# Altium PCB PCB1.PcbDoc
Units mil, origin at the board's own origin, x right, y up, seen from the top; angles counter-clockwise.
Board outline 6000 x 4000 mil, 2 copper layers (Top Layer, Bottom Layer); 65 components, 72 nets, 252 pads, 4 vias.
Unrouted connection lines stored in the file: 163.
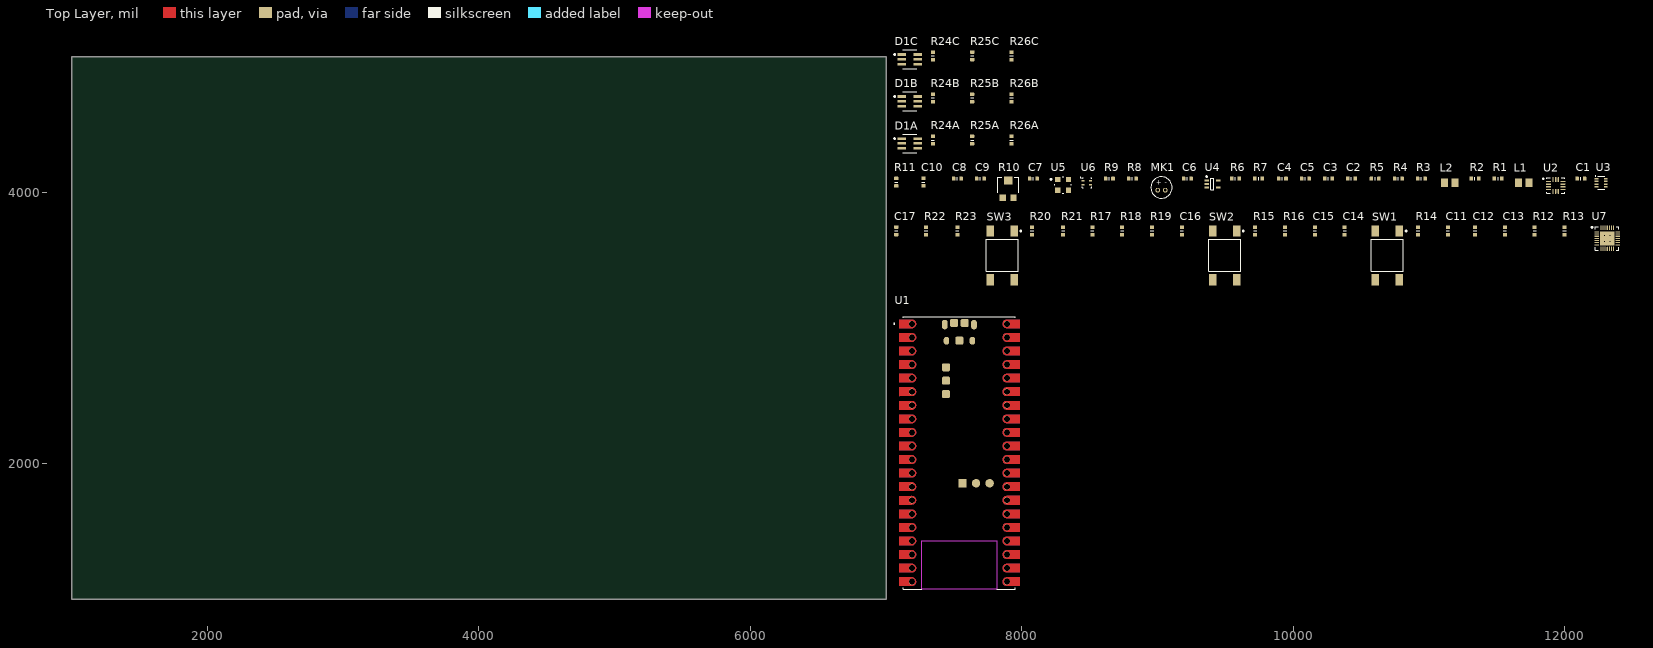
[diagram p0: Top Layer view]
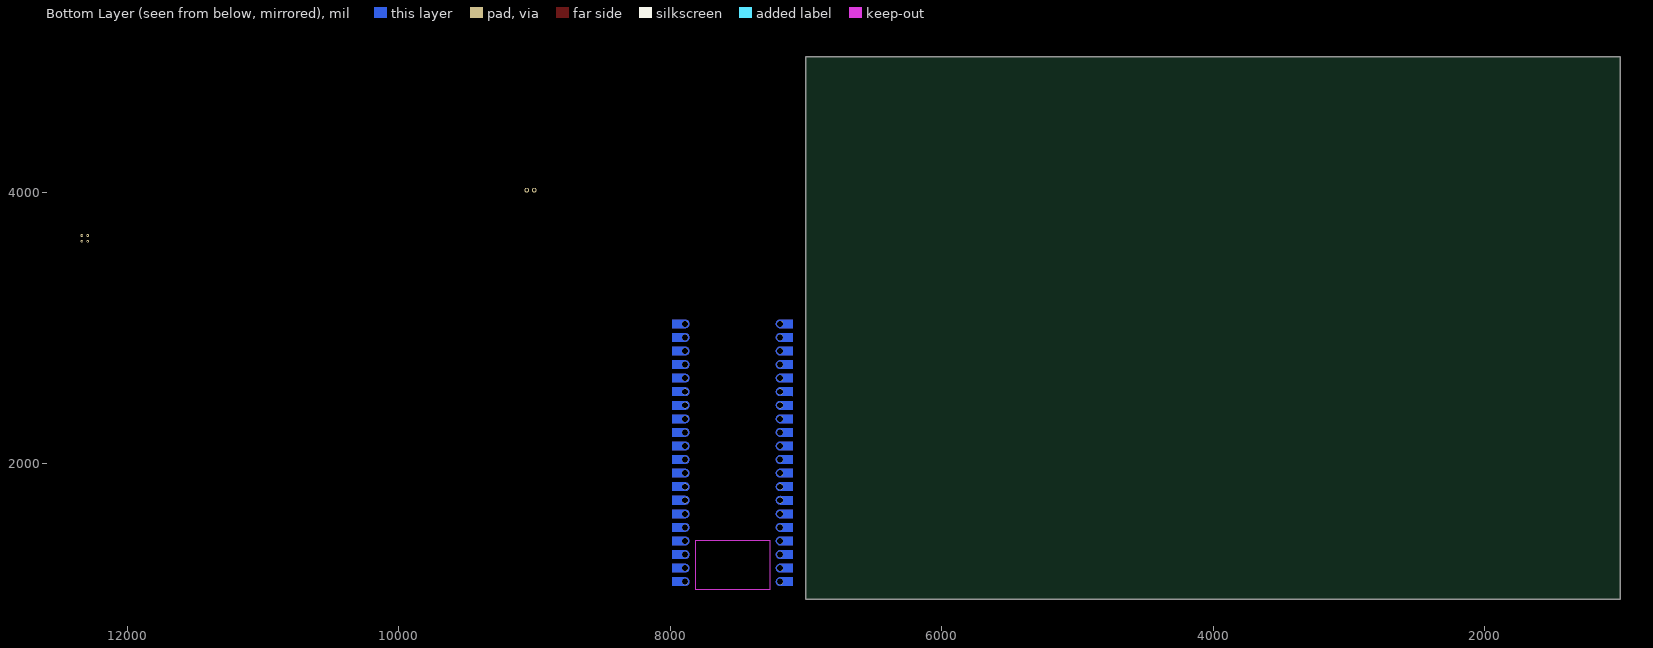
[diagram p1: Bottom Layer view, seen from below]

## Layer stack, top to bottom
Top Solder: solder mask 0.4, Solder Resist, Dk 3.5
Top Layer: signal copper 1.4
Dielectric 1: dielectric 12.6, FR-4, Dk 4.8
Bottom Layer: signal copper 1.4
Bottom Solder: solder mask 0.4, Solder Resist, Dk 3.5

## Board outline
1000,1000 7000,1000 7000,5000 1000,5000

## Design rules (kind name [scope] priority, off if disabled: settings)
Clearance [All] p1: gap=10 ignorepadtopadclearanceinfootprint=FALSE
PolygonConnect [All] p1: connectstyle=Relief reliefconductorwidth=10 reliefentries=4 polygonreliefangle="90 Angle" airgapwidth=10
RoutingVias [All] p1: holewidth=28 width=50 viastyle="Through Hole" minholewidth=28 minwidth=50 maxholewidth=28 maxwidth=50
SolderMaskExpansion [All] p1: expansion=4 istentingtop=FALSE
SupplyNets "Schematic Supply Nets_6" [InNet('VREF')] p1: voltage=0.000
SupplyNets "Schematic Supply Nets_5" [InNet('VSYS')] p2: voltage=0.000
SupplyNets "Schematic Supply Nets_4" [InNet('VBUS')] p3: voltage=0.000
SupplyNets "Schematic Supply Nets_3" [InNet('GND')] p4: voltage=0.000
SupplyNets "Schematic Supply Nets_2" [InNet('AGND')] p5: voltage=0.000
SupplyNets "Schematic Supply Nets_1" [InNet('+3V3')] p6: voltage=0.000
SupplyNets "Schematic Supply Nets" [InNet('+3V3A')] p7: voltage=0.000
Width [All] p1: maxlimit=10 minlimit=10 preferedwidth=10
30 further rules are at their usual default settings.

## Classes and differential pairs
channel class "[6] RgbLed": "\"RGB LEDs\"1" "\"RGB LEDs\"2" "\"RGB LEDs\"3"
component class Sensors: C1 C2 C3 C4 C5 C6 C7 C8 C9 C10 L1 L2 MK1 R1 R2 R3 R4 R5 R6 R7 R8 R9 R10 R11 U2 U3 U4 U5 U6
component class ButtonsAndLeds: C11 C12 C13 C14 C15 C16 C17 R12 R13 R14 R15 R16 R17 R18 R19 R20 R21 R22 R23 SW1 SW2 SW3 U7
component class "[3] TopLevel": U1
component class "\"RGB LEDs\"3": D1C R24C R25C R26C
component class "\"RGB LEDs\"2": D1B R24B R25B R26B
component class "\"RGB LEDs\"1": D1A R24A R25A R26A

## Components (designator, comment, footprint, x,y, rotation, side; value= is the part's Value field where it differs from the comment)
C1 "VJ0603Y104MXJCW1BC" CAPC0603(1608)100_L 12120,4100 r0 top value=100nF
C2 "VJ0603Y104MXJCW1BC" CAPC0603(1608)100_L 10430,4100 r0 top value=100nF
C3 "VJ0603Y104MXJCW1BC" CAPC0603(1608)100_L 10260,4100 r0 top value=100nF
C4 "VJ0603Y104MXJCW1BC" CAPC0603(1608)100_L 9920,4100 r0 top value=100nF
C5 "VJ0603Y104MXJCW1BC" CAPC0603(1608)100_L 10090,4100 r0 top value=100nF
C6 "VJ0603Y104MXJCW1BC" CAPC0603(1608)100_L 9220,4100 r0 top value=100nF
C7 "C0603C101K5GACTU" CAPC0603(1608)100_L 8085,4100 r0 top value=100pF
C8 "GRM188R60J106ME47D" CAPC0603(1608)100_L 7525,4100 r0 top value=10uF
C9 "VJ0603Y104MXJCW1BC" CAPC0603(1608)100_L 7695,4100 r0 top value=100nF
C10 "VJ0603Y104MXJCW1BC" CAPC0603(1608)100_L 7275,4075 r90 top value=100nF
C11 "VJ0603Y104MXJCW1BC" CAPC0603(1608)100_L 11140,3715 r90 top value=100nF
C12 "VJ0603Y104MXJCW1BC" CAPC0603(1608)100_L 11340,3715 r90 top value=100nF
C13 "VJ0603Y104MXJCW1BC" CAPC0603(1608)100_L 11560,3715 r90 top value=100nF
C14 "VJ0603Y104MXJCW1BC" CAPC0603(1608)100_L 10380,3715 r90 top value=100nF
C15 "VJ0603Y103KXAAC" CAPC0603(1608)100_L 10160,3715 r90 top value=10nF
C16 "VJ0603Y103KXAAC" CAPC0603(1608)100_L 9180,3715 r90 top value=10nF
C17 "VJ0603Y103KXAAC" CAPC0603(1608)100_L 7075,3715 r90 top value=10nF
D1A "ASMT-YTB7-0AA02" FP-PLCC-6-MFG 7175,4360 r0 top (schematic designator D1)
D1B "ASMT-YTB7-0AA02" FP-PLCC-6-MFG 7175,4670 r0 top (schematic designator D1)
D1C "ASMT-YTB7-0AA02" FP-PLCC-6-MFG 7175,4980 r0 top (schematic designator D1)
L1 "BLM21PG331SN1D" INDC2013X105X50ML20T20 11700,4070 r0 top
L2 "BLM21PG331SN1D" INDC2013X105X50ML20T20 11155,4070 r0 top
MK1 "CMEJ-0415-42-LP" MIC_CMEJ-0415-42-LP 9030,4035 r0 top
R1 "Resistor 10k +/-1% 0603 100 mW" RESC0603(1608)_L 11510,4100 r0 top value=10k
R2 "Resistor 10k +/-1% 0603 100 mW" RESC0603(1608)_L 11340,4100 r0 top value=10k
R3 "Resistor 1k +/-1% 0603 100 mW" RESC0603(1608)_L 10945,4100 r0 top value=1k
R4 "Resistor 0R +/- 5% 0603 100 mW" RESC0603(1608)_L 10775,4100 r0 top value=0
R5 "Resistor 0R +/- 5% 0603 100 mW" RESC0603(1608)_L 10605,4100 r0 top value=0
R6 "Resistor 1k +/-1% 0603 100 mW" RESC0603(1608)_L 9575,4100 r0 top value=1k
R7 "Resistor 100k +/-1% 0603 100 mW" RESC0603(1608)_L 9745,4100 r0 top value=100k
R8 "Resistor 100k +/-1% 0603 100 mW" RESC0603(1608)_L 8815,4100 r0 top value=100k
R9 "Resistor 1k +/-1% 0603 100 mW" RESC0603(1608)_L 8645,4100 r0 top value=1k
R10 "TC33X-2-104E" FP-TC33X-2-MFG 7900,4025 r0 top value=100kR
R11 "CRCW06032K20FKEA" RESC0603(1608)_L 7075,4075 r90 top value=2.2kR
R12 "Resistor 10k +/-1% 0603 100 mW" RESC0603(1608)_L 11780,3715 r90 top value=10k
R13 "Resistor 10k +/-1% 0603 100 mW" RESC0603(1608)_L 12000,3715 r90 top value=10k
R14 "Resistor 10k +/-1% 0603 100 mW" RESC0603(1608)_L 10920,3715 r90 top value=10k
R15 "Resistor 10k +/-1% 0603 100 mW" RESC0603(1608)_L 9720,3715 r90 top value=10k
R16 "Resistor 10k +/-1% 0603 100 mW" RESC0603(1608)_L 9940,3715 r90 top value=10k
R17 "Resistor 10k +/-1% 0603 100 mW" RESC0603(1608)_L 8520,3715 r90 top value=10k
R18 "Resistor 0R +/- 5% 0603 100 mW" RESC0603(1608)_L 8740,3715 r90 top value=0
R19 "Resistor 0R +/- 5% 0603 100 mW" RESC0603(1608)_L 8960,3715 r90 top value=0
R20 "Resistor 10k +/-1% 0603 100 mW" RESC0603(1608)_L 8075,3715 r90 top value=10k
R21 "Resistor 10k +/-1% 0603 100 mW" RESC0603(1608)_L 8305,3715 r90 top value=10k
R22 "Resistor 0R +/- 5% 0603 100 mW" RESC0603(1608)_L 7295,3715 r90 top value=0
R23 "Resistor 0R +/- 5% 0603 100 mW" RESC0603(1608)_L 7525,3715 r90 top value=0
R24A "CRCW0603150RFKEA" RESC0603(1608)_L 7345,4385 r90 top value=150R (schematic designator R24)
R24B "CRCW0603150RFKEA" RESC0603(1608)_L 7345,4695 r90 top value=150R (schematic designator R24)
R24C "CRCW0603150RFKEA" RESC0603(1608)_L 7345,5005 r90 top value=150R (schematic designator R24)
R25A "CRCW060350R0FKEA" RESC0603(1608)_L 7635,4385 r90 top value=50R (schematic designator R25)
R25B "CRCW060350R0FKEA" RESC0603(1608)_L 7635,4695 r90 top value=50R (schematic designator R25)
R25C "CRCW060350R0FKEA" RESC0603(1608)_L 7635,5005 r90 top value=50R (schematic designator R25)
R26A "CRCW060350R0FKEA" RESC0603(1608)_L 7925,4385 r90 top value=50R (schematic designator R26)
R26B "CRCW060350R0FKEA" RESC0603(1608)_L 7925,4695 r90 top value=50R (schematic designator R26)
R26C "CRCW060350R0FKEA" RESC0603(1608)_L 7925,5005 r90 top value=50R (schematic designator R26)
SW1 "FSM4JSMA" TECO-FSM4JSMA_V 10695,3535 r0 top
SW2 "FSM4JSMA" TECO-FSM4JSMA_V 9495,3535 r0 top
SW3 "FSM4JSMA" TECO-FSM4JSMA_V 7855,3535 r0 top
U1 "SC0918" MODULE_SC0918 7190,1130 r0 top
U2 "ICM-42670-P" QFN50P300X250X81-14N 11935,4050 r0 top
U3 "OPT4001DTSR" SON50P130X60-8N 12270,4070 r0 top
U4 "MAX4466EXK-T" SOT65P200X110-5N 9405,4060 r0 top
U5 "MS563702BA03-50" FP-MS563702BA03-50-MFG 8305,4055 r0 top
U6 "SHT40I-AD1B-R3" QFN80P150X150X55-4N 8480,4070 r0 top
U7 "SX1509BIULTRT" QFN40P410X410X60_HS-29N 12315,3660 r0 top

## Footprints (in the part's own frame and the unit in brackets; to place one, negate y for a bottom-side part, rotate by r counter-clockwise, add the part's x,y. Pads: shape width x height; smd on the part's side, far side on the other; paste and mask are expansions set on the pad)
CAPC0603(1608)100_L [mm] "Chip Capacitor, Body 1.6x0.8mm, Height 1.0mm, IPC High Density"
  rrect25% 0.66x0.76 smd: 1(-0.7,0) 2(0.7,0)
  silkscreen extent 0,-0.3 0,0.3, body extent -0.8,-0.4 0.8,0.4, height 0.95
FP-MS563702BA03-50-MFG [mm]
  rect 1x1 smd paste+0 mask+0.001: 1(-1,1) 2(-1,-1) 3(1,-1) 4(1,1)
  silkscreen extent -2.4,-1.55 1.55,1.55, body extent -1.65,-1.65 1.65,1.65, height 0.25
FP-PLCC-6-MFG [mm]
  rect 1.6x0.5 smd paste+0 mask+0.05: 1(-1.475,0.9) 2(-1.475,0) 3(-1.475,-0.9) 4(1.475,-0.9) 5(1.475,0) 6(1.475,0.9)
  silkscreen extent -2.97,-1.75 1.3,1.75, body extent -2.37,-1.6 2.37,1.6, height 0.25
FP-TC33X-2-MFG [mm]
  rect 1.2x1.2 smd paste+0 mask+0: 1(-1,-1.675) 3(1,-1.675)
  rect 1.6x1.5 smd paste+0 mask+0: 2(0,1.575)
  silkscreen extent -1.95,-0.7 1.95,2.17, body extent -1.8,-1.9 1.8,1.9, height 1.5
INDC2013X105X50ML20T20 [mm] "Chip Inductor, 2-Leads, Body 2.2x1.45mm, IPC Low Density"
  rect 1.33x1.57 smd: 1(-0.985,0) 2(0.985,0)
  body extent -1.1,-0.72 1.1,0.72, height 1.05
MIC_CMEJ-0415-42-LP [mm]
  round 0.9 hole 0.55: N(0.7,-0.5) P(-0.7,-0.5)
  silkscreen extent -2,-2 2,2, body extent -2,-2 2,2, height 1.88
MODULE_SC0918 [mm]
  round 1.125 hole 1.1 paste+0: 1(0,48.26) 2(0,45.72) 3(0,43.18) 4(0,40.64) 5(0,38.1) 6(0,35.56) 7(0,33.02) 8(0,30.48) 9(0,27.94) 10(0,25.4) 11(0,22.86) 12(0,20.32) 13(0,17.78) 14(0,15.24) 15(0,12.7) 16(0,10.16) 17(0,7.62) 18(0,5.08) 19(0,2.54) 20(0,0) 21(17.78,0) 22(17.78,2.54) 23(17.78,5.08) 24(17.78,7.62) 25(17.78,10.16) 26(17.78,12.7) 27(17.78,15.24) 28(17.78,17.78) 29(17.78,20.32) 30(17.78,22.86) 31(17.78,25.4) 32(17.78,27.94) 33(17.78,30.48) 34(17.78,33.02) 35(17.78,35.56) 36(17.78,38.1) 37(17.78,40.64) 38(17.78,43.18) 39(17.78,45.72) 40(17.78,48.26)
  oval 1.1x1.8 smd: A(6.168,48.128) B(11.618,48.128)
  oval 1.05x1.45 smd: C(6.468,45.098) D(11.318,45.098)
  rect 1.575x1.575 smd: E(9.477,18.428)
  round 1.575 smd: F(12.017,18.428) G(14.557,18.428)
  rrect40% 1.5x1.5 smd: TP1(8.893,45.128) TP2(9.893,48.428) TP3(7.893,48.428) TP4(6.393,40.128) TP5(6.393,37.628) TP6(6.393,35.128)
  Top Layer region: 0,47.46 -2.397,47.458 -2.397,49.058 0,49.06 0.306,48.999 0.566,48.826 0.739,48.566 0.8,48.26 0.8,48.26 0.739,47.954 0.566,47.694 0.306,47.521 0,47.46
  Top Layer region: 17.78,0.8 20.177,0.802 20.177,-0.798 17.78,-0.8 17.474,-0.739 17.214,-0.566 17.041,-0.306 16.98,0 16.98,0 17.041,0.306 17.214,0.566 17.474,0.739 17.78,0.8
  Top Layer region: 17.78,49.06 20.177,49.062 20.177,47.462 17.78,47.46 17.474,47.521 17.214,47.694 17.041,47.954 16.98,48.26 16.98,48.26 17.041,48.566 17.214,48.826 17.474,48.999 17.78,49.06
  Top Layer region: 17.78,46.52 20.177,46.522 20.177,44.922 17.78,44.92 17.474,44.981 17.214,45.154 17.041,45.414 16.98,45.72 16.98,45.72 17.041,46.026 17.214,46.286 17.474,46.459 17.78,46.52
  Top Layer region: 17.78,43.98 20.177,43.982 20.177,42.382 17.78,42.38 17.474,42.441 17.214,42.614 17.041,42.874 16.98,43.18 16.98,43.18 17.041,43.486 17.214,43.746 17.474,43.919 17.78,43.98
  Top Layer region: 17.78,41.44 20.177,41.442 20.177,39.842 17.78,39.84 17.474,39.901 17.214,40.074 17.041,40.334 16.98,40.64 16.98,40.64 17.041,40.946 17.214,41.206 17.474,41.379 17.78,41.44
  Top Layer region: 17.78,38.9 20.177,38.902 20.177,37.302 17.78,37.3 17.474,37.361 17.214,37.534 17.041,37.794 16.98,38.1 16.98,38.1 17.041,38.406 17.214,38.666 17.474,38.839 17.78,38.9
  Top Layer region: 17.78,36.36 20.177,36.362 20.177,34.762 17.78,34.76 17.474,34.821 17.214,34.994 17.041,35.254 16.98,35.56 16.98,35.56 17.041,35.866 17.214,36.126 17.474,36.299 17.78,36.36
  Top Layer region: 17.78,33.82 20.177,33.822 20.177,32.222 17.78,32.22 17.474,32.281 17.214,32.454 17.041,32.714 16.98,33.02 16.98,33.02 17.041,33.326 17.214,33.586 17.474,33.759 17.78,33.82
  Top Layer region: 17.78,31.28 20.177,31.282 20.177,29.682 17.78,29.68 17.474,29.741 17.214,29.914 17.041,30.174 16.98,30.48 16.98,30.48 17.041,30.786 17.214,31.046 17.474,31.219 17.78,31.28
  Top Layer region: 17.78,28.74 20.177,28.742 20.177,27.142 17.78,27.14 17.474,27.201 17.214,27.374 17.041,27.634 16.98,27.94 16.98,27.94 17.041,28.246 17.214,28.506 17.474,28.679 17.78,28.74
  Top Layer region: 17.78,26.2 20.177,26.202 20.177,24.602 17.78,24.6 17.474,24.661 17.214,24.834 17.041,25.094 16.98,25.4 16.98,25.4 17.041,25.706 17.214,25.966 17.474,26.139 17.78,26.2
  Top Layer region: 17.78,23.66 20.177,23.662 20.177,22.062 17.78,22.06 17.474,22.121 17.214,22.294 17.041,22.554 16.98,22.86 16.98,22.86 17.041,23.166 17.214,23.426 17.474,23.599 17.78,23.66
  Top Layer region: 17.78,21.12 20.177,21.122 20.177,19.522 17.78,19.52 17.474,19.581 17.214,19.754 17.041,20.014 16.98,20.32 16.98,20.32 17.041,20.626 17.214,20.886 17.474,21.059 17.78,21.12
  Top Layer region: 17.78,18.58 20.177,18.582 20.177,16.982 17.78,16.98 17.474,17.041 17.214,17.214 17.041,17.474 16.98,17.78 16.98,17.78 17.041,18.086 17.214,18.346 17.474,18.519 17.78,18.58
  Top Layer region: 17.78,16.04 20.177,16.042 20.177,14.442 17.78,14.44 17.474,14.501 17.214,14.674 17.041,14.934 16.98,15.24 16.98,15.24 17.041,15.546 17.214,15.806 17.474,15.979 17.78,16.04
  Top Layer region: 0,44.92 -2.397,44.918 -2.397,46.518 0,46.52 0.306,46.459 0.566,46.286 0.739,46.026 0.8,45.72 0.8,45.72 0.739,45.414 0.566,45.154 0.306,44.981 0,44.92
  Top Layer region: 0,42.38 -2.397,42.378 -2.397,43.978 0,43.98 0.306,43.919 0.566,43.746 0.739,43.486 0.8,43.18 0.8,43.18 0.739,42.874 0.566,42.614 0.306,42.441 0,42.38
  Top Layer region: 0,39.84 -2.397,39.838 -2.397,41.438 0,41.44 0.306,41.379 0.566,41.206 0.739,40.946 0.8,40.64 0.8,40.64 0.739,40.334 0.566,40.074 0.306,39.901 0,39.84
  Top Layer region: 0,37.3 -2.397,37.298 -2.397,38.898 0,38.9 0.306,38.839 0.566,38.666 0.739,38.406 0.8,38.1 0.8,38.1 0.739,37.794 0.566,37.534 0.306,37.361 0,37.3
  Top Layer region: 0,34.76 -2.397,34.758 -2.397,36.358 0,36.36 0.306,36.299 0.566,36.126 0.739,35.866 0.8,35.56 0.8,35.56 0.739,35.254 0.566,34.994 0.306,34.821 0,34.76
  Top Layer region: 0,32.22 -2.397,32.218 -2.397,33.818 0,33.82 0.306,33.759 0.566,33.586 0.739,33.326 0.8,33.02 0.8,33.02 0.739,32.714 0.566,32.454 0.306,32.281 0,32.22
  Top Layer region: 0,29.68 -2.397,29.678 -2.397,31.278 0,31.28 0.306,31.219 0.566,31.046 0.739,30.786 0.8,30.48 0.8,30.48 0.739,30.174 0.566,29.914 0.306,29.741 0,29.68
  Top Layer region: 0,27.14 -2.397,27.138 -2.397,28.738 0,28.74 0.306,28.679 0.566,28.506 0.739,28.246 0.8,27.94 0.8,27.94 0.739,27.634 0.566,27.374 0.306,27.201 0,27.14
  Top Layer region: 0,24.6 -2.397,24.598 -2.397,26.198 0,26.2 0.306,26.139 0.566,25.966 0.739,25.706 0.8,25.4 0.8,25.4 0.739,25.094 0.566,24.834 0.306,24.661 0,24.6
  Top Layer region: 0,22.06 -2.397,22.058 -2.397,23.658 0,23.66 0.306,23.599 0.566,23.426 0.739,23.166 0.8,22.86 0.8,22.86 0.739,22.554 0.566,22.294 0.306,22.121 0,22.06
  Top Layer region: 0,19.52 -2.397,19.518 -2.397,21.118 0,21.12 0.306,21.059 0.566,20.886 0.739,20.626 0.8,20.32 0.8,20.32 0.739,20.014 0.566,19.754 0.306,19.581 0,19.52
  Top Layer region: 0,16.98 -2.397,16.978 -2.397,18.578 0,18.58 0.306,18.519 0.566,18.346 0.739,18.086 0.8,17.78 0.8,17.78 0.739,17.474 0.566,17.214 0.306,17.041 0,16.98
  Top Layer region: 0,14.44 -2.397,14.438 -2.397,16.038 0,16.04 0.306,15.979 0.566,15.806 0.739,15.546 0.8,15.24 0.8,15.24 0.739,14.934 0.566,14.674 0.306,14.501 0,14.44
  Top Layer region: 0,11.9 -2.397,11.898 -2.397,13.498 0,13.5 0.306,13.439 0.566,13.266 0.739,13.006 0.8,12.7 0.8,12.7 0.739,12.394 0.566,12.134 0.306,11.961 0,11.9
  Top Layer region: 0,9.36 -2.397,9.358 -2.397,10.958 0,10.96 0.306,10.899 0.566,10.726 0.739,10.466 0.8,10.16 0.8,10.16 0.739,9.854 0.566,9.594 0.306,9.421 0,9.36
  Top Layer region: 0,6.82 -2.397,6.818 -2.397,8.418 0,8.42 0.306,8.359 0.566,8.186 0.739,7.926 0.8,7.62 0.8,7.62 0.739,7.314 0.566,7.054 0.306,6.881 0,6.82
  Top Layer region: 0,4.28 -2.397,4.278 -2.397,5.878 0,5.88 0.306,5.819 0.566,5.646 0.739,5.386 0.8,5.08 0.8,5.08 0.739,4.774 0.566,4.514 0.306,4.341 0,4.28
  Top Layer region: 0,1.74 -2.397,1.738 -2.397,3.338 0,3.34 0.306,3.279 0.566,3.106 0.739,2.846 0.8,2.54 0.8,2.54 0.739,2.234 0.566,1.974 0.306,1.801 0,1.74
  Top Layer region: 0,-0.8 -2.397,-0.802 -2.397,0.798 0,0.8 0.306,0.739 0.566,0.566 0.739,0.306 0.8,0 0.8,0 0.739,-0.306 0.566,-0.566 0.306,-0.739 0,-0.8
  Top Layer region: 17.78,3.34 20.177,3.342 20.177,1.742 17.78,1.74 17.474,1.801 17.214,1.974 17.041,2.234 16.98,2.54 16.98,2.54 17.041,2.846 17.214,3.106 17.474,3.279 17.78,3.34
  Top Layer region: 17.78,5.88 20.177,5.882 20.177,4.282 17.78,4.28 17.474,4.341 17.214,4.514 17.041,4.774 16.98,5.08 16.98,5.08 17.041,5.386 17.214,5.646 17.474,5.819 17.78,5.88
  Top Layer region: 17.78,8.42 20.177,8.422 20.177,6.822 17.78,6.82 17.474,6.881 17.214,7.054 17.041,7.314 16.98,7.62 16.98,7.62 17.041,7.926 17.214,8.186 17.474,8.359 17.78,8.42
  Top Layer region: 17.78,10.96 20.177,10.962 20.177,9.362 17.78,9.36 17.474,9.421 17.214,9.594 17.041,9.854 16.98,10.16 16.98,10.16 17.041,10.466 17.214,10.726 17.474,10.899 17.78,10.96
  Top Layer region: 17.78,13.5 20.177,13.502 20.177,11.902 17.78,11.9 17.474,11.961 17.214,12.134 17.041,12.394 16.98,12.7 16.98,12.7 17.041,13.006 17.214,13.266 17.474,13.439 17.78,13.5
  Bottom Layer region: 0,47.46 -2.397,47.458 -2.397,49.058 0,49.06 0.306,48.999 0.566,48.826 0.739,48.566 0.8,48.26 0.8,48.26 0.739,47.954 0.566,47.694 0.306,47.521 0,47.46
  Bottom Layer region: 17.78,0.8 20.177,0.802 20.177,-0.798 17.78,-0.8 17.474,-0.739 17.214,-0.566 17.041,-0.306 16.98,0 16.98,0 17.041,0.306 17.214,0.566 17.474,0.739 17.78,0.8
  Bottom Layer region: 17.78,49.06 20.177,49.062 20.177,47.462 17.78,47.46 17.474,47.521 17.214,47.694 17.041,47.954 16.98,48.26 16.98,48.26 17.041,48.566 17.214,48.826 17.474,48.999 17.78,49.06
  Bottom Layer region: 17.78,46.52 20.177,46.522 20.177,44.922 17.78,44.92 17.474,44.981 17.214,45.154 17.041,45.414 16.98,45.72 16.98,45.72 17.041,46.026 17.214,46.286 17.474,46.459 17.78,46.52
  Bottom Layer region: 17.78,43.98 20.177,43.982 20.177,42.382 17.78,42.38 17.474,42.441 17.214,42.614 17.041,42.874 16.98,43.18 16.98,43.18 17.041,43.486 17.214,43.746 17.474,43.919 17.78,43.98
  Bottom Layer region: 17.78,41.44 20.177,41.442 20.177,39.842 17.78,39.84 17.474,39.901 17.214,40.074 17.041,40.334 16.98,40.64 16.98,40.64 17.041,40.946 17.214,41.206 17.474,41.379 17.78,41.44
  Bottom Layer region: 17.78,38.9 20.177,38.902 20.177,37.302 17.78,37.3 17.474,37.361 17.214,37.534 17.041,37.794 16.98,38.1 16.98,38.1 17.041,38.406 17.214,38.666 17.474,38.839 17.78,38.9
  Bottom Layer region: 17.78,36.36 20.177,36.362 20.177,34.762 17.78,34.76 17.474,34.821 17.214,34.994 17.041,35.254 16.98,35.56 16.98,35.56 17.041,35.866 17.214,36.126 17.474,36.299 17.78,36.36
  Bottom Layer region: 17.78,33.82 20.177,33.822 20.177,32.222 17.78,32.22 17.474,32.281 17.214,32.454 17.041,32.714 16.98,33.02 16.98,33.02 17.041,33.326 17.214,33.586 17.474,33.759 17.78,33.82
  Bottom Layer region: 17.78,31.28 20.177,31.282 20.177,29.682 17.78,29.68 17.474,29.741 17.214,29.914 17.041,30.174 16.98,30.48 16.98,30.48 17.041,30.786 17.214,31.046 17.474,31.219 17.78,31.28
  Bottom Layer region: 17.78,28.74 20.177,28.742 20.177,27.142 17.78,27.14 17.474,27.201 17.214,27.374 17.041,27.634 16.98,27.94 16.98,27.94 17.041,28.246 17.214,28.506 17.474,28.679 17.78,28.74
  Bottom Layer region: 17.78,26.2 20.177,26.202 20.177,24.602 17.78,24.6 17.474,24.661 17.214,24.834 17.041,25.094 16.98,25.4 16.98,25.4 17.041,25.706 17.214,25.966 17.474,26.139 17.78,26.2
  Bottom Layer region: 17.78,23.66 20.177,23.662 20.177,22.062 17.78,22.06 17.474,22.121 17.214,22.294 17.041,22.554 16.98,22.86 16.98,22.86 17.041,23.166 17.214,23.426 17.474,23.599 17.78,23.66
  Bottom Layer region: 17.78,21.12 20.177,21.122 20.177,19.522 17.78,19.52 17.474,19.581 17.214,19.754 17.041,20.014 16.98,20.32 16.98,20.32 17.041,20.626 17.214,20.886 17.474,21.059 17.78,21.12
  Bottom Layer region: 17.78,18.58 20.177,18.582 20.177,16.982 17.78,16.98 17.474,17.041 17.214,17.214 17.041,17.474 16.98,17.78 16.98,17.78 17.041,18.086 17.214,18.346 17.474,18.519 17.78,18.58
  Bottom Layer region: 17.78,16.04 20.177,16.042 20.177,14.442 17.78,14.44 17.474,14.501 17.214,14.674 17.041,14.934 16.98,15.24 16.98,15.24 17.041,15.546 17.214,15.806 17.474,15.979 17.78,16.04
  Bottom Layer region: 0,44.92 -2.397,44.918 -2.397,46.518 0,46.52 0.306,46.459 0.566,46.286 0.739,46.026 0.8,45.72 0.8,45.72 0.739,45.414 0.566,45.154 0.306,44.981 0,44.92
  Bottom Layer region: 0,42.38 -2.397,42.378 -2.397,43.978 0,43.98 0.306,43.919 0.566,43.746 0.739,43.486 0.8,43.18 0.8,43.18 0.739,42.874 0.566,42.614 0.306,42.441 0,42.38
  Bottom Layer region: 0,39.84 -2.397,39.838 -2.397,41.438 0,41.44 0.306,41.379 0.566,41.206 0.739,40.946 0.8,40.64 0.8,40.64 0.739,40.334 0.566,40.074 0.306,39.901 0,39.84
  Bottom Layer region: 0,37.3 -2.397,37.298 -2.397,38.898 0,38.9 0.306,38.839 0.566,38.666 0.739,38.406 0.8,38.1 0.8,38.1 0.739,37.794 0.566,37.534 0.306,37.361 0,37.3
  Bottom Layer region: 0,34.76 -2.397,34.758 -2.397,36.358 0,36.36 0.306,36.299 0.566,36.126 0.739,35.866 0.8,35.56 0.8,35.56 0.739,35.254 0.566,34.994 0.306,34.821 0,34.76
  Bottom Layer region: 0,32.22 -2.397,32.218 -2.397,33.818 0,33.82 0.306,33.759 0.566,33.586 0.739,33.326 0.8,33.02 0.8,33.02 0.739,32.714 0.566,32.454 0.306,32.281 0,32.22
  Bottom Layer region: 0,29.68 -2.397,29.678 -2.397,31.278 0,31.28 0.306,31.219 0.566,31.046 0.739,30.786 0.8,30.48 0.8,30.48 0.739,30.174 0.566,29.914 0.306,29.741 0,29.68
  Bottom Layer region: 0,27.14 -2.397,27.138 -2.397,28.738 0,28.74 0.306,28.679 0.566,28.506 0.739,28.246 0.8,27.94 0.8,27.94 0.739,27.634 0.566,27.374 0.306,27.201 0,27.14
  Bottom Layer region: 0,24.6 -2.397,24.598 -2.397,26.198 0,26.2 0.306,26.139 0.566,25.966 0.739,25.706 0.8,25.4 0.8,25.4 0.739,25.094 0.566,24.834 0.306,24.661 0,24.6
  Bottom Layer region: 0,22.06 -2.397,22.058 -2.397,23.658 0,23.66 0.306,23.599 0.566,23.426 0.739,23.166 0.8,22.86 0.8,22.86 0.739,22.554 0.566,22.294 0.306,22.121 0,22.06
  Bottom Layer region: 0,19.52 -2.397,19.518 -2.397,21.118 0,21.12 0.306,21.059 0.566,20.886 0.739,20.626 0.8,20.32 0.8,20.32 0.739,20.014 0.566,19.754 0.306,19.581 0,19.52
  Bottom Layer region: 0,16.98 -2.397,16.978 -2.397,18.578 0,18.58 0.306,18.519 0.566,18.346 0.739,18.086 0.8,17.78 0.8,17.78 0.739,17.474 0.566,17.214 0.306,17.041 0,16.98
  Bottom Layer region: 0,14.44 -2.397,14.438 -2.397,16.038 0,16.04 0.306,15.979 0.566,15.806 0.739,15.546 0.8,15.24 0.8,15.24 0.739,14.934 0.566,14.674 0.306,14.501 0,14.44
  Bottom Layer region: 0,11.9 -2.397,11.898 -2.397,13.498 0,13.5 0.306,13.439 0.566,13.266 0.739,13.006 0.8,12.7 0.8,12.7 0.739,12.394 0.566,12.134 0.306,11.961 0,11.9
  Bottom Layer region: 0,9.36 -2.397,9.358 -2.397,10.958 0,10.96 0.306,10.899 0.566,10.726 0.739,10.466 0.8,10.16 0.8,10.16 0.739,9.854 0.566,9.594 0.306,9.421 0,9.36
  Bottom Layer region: 0,6.82 -2.397,6.818 -2.397,8.418 0,8.42 0.306,8.359 0.566,8.186 0.739,7.926 0.8,7.62 0.8,7.62 0.739,7.314 0.566,7.054 0.306,6.881 0,6.82
  Bottom Layer region: 0,4.28 -2.397,4.278 -2.397,5.878 0,5.88 0.306,5.819 0.566,5.646 0.739,5.386 0.8,5.08 0.8,5.08 0.739,4.774 0.566,4.514 0.306,4.341 0,4.28
  Bottom Layer region: 0,1.74 -2.397,1.738 -2.397,3.338 0,3.34 0.306,3.279 0.566,3.106 0.739,2.846 0.8,2.54 0.8,2.54 0.739,2.234 0.566,1.974 0.306,1.801 0,1.74
  Bottom Layer region: 0,-0.8 -2.397,-0.802 -2.397,0.798 0,0.8 0.306,0.739 0.566,0.566 0.739,0.306 0.8,0 0.8,0 0.739,-0.306 0.566,-0.566 0.306,-0.739 0,-0.8
  Bottom Layer region: 17.78,3.34 20.177,3.342 20.177,1.742 17.78,1.74 17.474,1.801 17.214,1.974 17.041,2.234 16.98,2.54 16.98,2.54 17.041,2.846 17.214,3.106 17.474,3.279 17.78,3.34
  Bottom Layer region: 17.78,5.88 20.177,5.882 20.177,4.282 17.78,4.28 17.474,4.341 17.214,4.514 17.041,4.774 16.98,5.08 16.98,5.08 17.041,5.386 17.214,5.646 17.474,5.819 17.78,5.88
  Bottom Layer region: 17.78,8.42 20.177,8.422 20.177,6.822 17.78,6.82 17.474,6.881 17.214,7.054 17.041,7.314 16.98,7.62 16.98,7.62 17.041,7.926 17.214,8.186 17.474,8.359 17.78,8.42
  Bottom Layer region: 17.78,10.96 20.177,10.962 20.177,9.362 17.78,9.36 17.474,9.421 17.214,9.594 17.041,9.854 16.98,10.16 16.98,10.16 17.041,10.466 17.214,10.726 17.474,10.899 17.78,10.96
  Bottom Layer region: 17.78,13.5 20.177,13.502 20.177,11.902 17.78,11.9 17.474,11.961 17.214,12.134 17.041,12.394 16.98,12.7 16.98,12.7 17.041,13.006 17.214,13.266 17.474,13.439 17.78,13.5
  Keep-Out Layer board cut-out: 15.893,-1.372 1.893,-1.372 1.893,7.628 15.893,7.628
  silkscreen extent -3.4,-1.37 19.39,49.63, body extent -1.61,-1.37 19.39,50.93, height 3.6
QFN40P410X410X60_HS-29N [mm] "QFN, 28-Leads, Body 4,10x4,10mm, Pitch 0,40mm, Thermal Pad 2,65x2,65mm, IPC Medium Density"
  oval 0.85x0.2 smd mask+0.05: 1(-1.975,1.2) 2(-1.975,0.8) 3(-1.975,0.4) 4(-1.975,0) 5(-1.975,-0.4) 6(-1.975,-0.8) 7(-1.975,-1.2) 15(1.975,-1.2) 16(1.975,-0.8) 17(1.975,-0.4) 18(1.975,0) 19(1.975,0.4) 20(1.975,0.8) 21(1.975,1.2)
  oval 0.2x0.85 smd mask+0.05: 8(-1.2,-1.975) 9(-0.8,-1.975) 10(-0.4,-1.975) 11(0,-1.975) 12(0.4,-1.975) 13(0.8,-1.975) 14(1.2,-1.975) 22(1.2,1.975) 23(0.8,1.975) 24(0.4,1.975) 25(0,1.975) 26(-0.4,1.975) 27(-0.8,1.975) 28(-1.2,1.975)
  rect 2.65x2.65 smd mask+0.05: 29(0,0)
  silkscreen extent -2.97,-2.2 2.2,2.2, body extent -2.07,-2.07 2.07,2.07, height 0.6
QFN50P300X250X81-14N [mm] "QFN, 14-Leads, Body 3,00x2,50mm, Pitch 0,50mm, IPC Medium Density"
  oval 0.95x0.25 smd mask+0.02: 1(-1.35,0.75) 2(-1.35,0.25) 3(-1.35,-0.25) 4(-1.35,-0.75) 8(1.35,-0.75) 9(1.35,-0.25) 10(1.35,0.25) 11(1.35,0.75)
  oval 0.25x0.95 smd mask+0.02: 5(-0.5,-1.1) 6(0,-1.1) 7(0.5,-1.1) 12(0.5,1.1) 13(0,1.1) 14(-0.5,1.1)
  silkscreen extent -2.45,-1.42 1.68,1.43, body extent -1.63,-1.38 1.63,1.38, height 0.81
QFN80P150X150X55-4N [mm] "QFN, 4-Leads, Body 1,50x1,50mm, Pitch 0,80mm, IPC Medium Density"
  rect 0.6x0.3 smd mask+0.05: 1(-0.7,0.4) 2(-0.7,-0.4) 3(0.7,-0.4) 4(0.7,0.4)
  silkscreen extent -1.25,-0.9 0.9,1.05, body extent -0.85,-0.75 0.85,0.76, height 0.55
RESC0603(1608)_L [mm] "Chip Resistor, Body 1.6x0.8mm, IPC High Density"
  rrect25% 0.66x0.76 smd: 1(-0.7,0) 2(0.7,0)
  silkscreen extent 0,-0.3 0,0.3, body extent -0.8,-0.4 0.8,0.4, height 0.45
SON50P130X60-8N [mm] "SON, 8-Leads, Body 2,20x1,30mm, Pitch 0,50mm, IPC Medium Density"
  rect 0.72x0.3 smd mask+0.05: 1(-0.86,0.75) 2(-0.86,0.25) 3(-0.86,-0.25) 4(-0.86,-0.75) 5(0.86,-0.75) 6(0.86,-0.25) 7(0.86,0.25) 8(0.86,0.75)
  silkscreen extent -1.1,-1.25 0.65,1.3, body extent -0.95,-1.06 0.95,1.06, height 0.55
SOT65P200X110-5N [mm] "SOT23, 5-Leads, Body 2,00x2,00mm, Pitch 0,65mm, IPC Medium Density"
  rect 0.8x0.4 smd mask+0.02: 1(-1.075,0.65) 2(-1.075,0) 3(-1.075,-0.65) 4(1.075,-0.65) 5(1.075,0.65)
  silkscreen extent -1.2,-1.1 0.3,1.52, body extent -1.2,-1.1 1.2,1.1, height 1.1
TECO-FSM4JSMA_V [mm] "SMD, 4-Leads, Body 6x6mm, Pitch 4.5mm"
  rect 1.4x2.1 smd: 1(2.25,4.55) 2(2.25,-4.55) 3(-2.25,4.55) 4(-2.25,-4.55)
  silkscreen extent -3,-3 3.63,4.67, body extent -3,-5 3,5, height 5.08

## Part data
C1 C2 C3 C4 C5 C6 C9 C10 C11 C12 C13 C14: library part CMP-001-00085-1, "Multilayer Ceramic Capacitor, 0.1 uF, 16 V, ± 20%, X7R, 0603 [1608 Metric]", Case Code (Imperial)=0603, Case Code (Metric)=1608, Dielectric=X7R, Dielectric Material=Tantalum, Manufacturer="Vishay Vitramon", Max Operating Temperature=125°C, Min Operating Temperature=-55°C, Package Quantity=4000, Tolerance=20%, Voltage Rating=16V, Case/Package=0603, Component Type=Capacitors, Construction=Flat, Depth=0.8mm, Height=0.95mm, Lead Free="Lead Free", Length=1.6mm, Manufacturer Part Number=VJ0603Y104MXJCW1BC, Mounting Technology="Surface Mount", Packaging="Tape and Reel", RoHS Compliant=Yes, Series=VJ, Termination=SMD/SMT, Voltage Rating (DC)=16V, Width=0.8mm
C7: library part CMP-001-00088-1, "Multilayer Ceramic Capacitor, 100 pF, 50 V, ï¿½ 10%, C0G (NP0), 0603 [1608 Metric]", Case Code (Imperial)=0603, Case Code (Metric)=1608, Dielectric=C0G, Dielectric Material=Ceramic, Manufacturer=KEMET, Max Operating Temperature=125°C, Min Operating Temperature=-55°C, Package Quantity=1, Temperature Coefficient=30ppm/°C, Tolerance=10%, Voltage Rating=50V, Case/Package=0603, Component Type=Capacitors, Construction=Flat, Depth=0.8mm, Dissipation Factor=0.1%, Height=0.8mm, Lead Free="Lead Free", Lead Pitch=0.7mm, Length=1.6mm, Manufacturer Part Number=C0603C101K5GACTU, Material=Ceramic, Mounting Technology="Surface Mount,PCB", Packaging="Tape and Reel", Radiation Hardening=No, Reach SVHC Compliant=No, RoHS Compliant=Yes, Series=C, Termination=SMD/SMT, Thickness=0.034inch, Voltage Rating (DC)=50V, Width=0.031inch
C8: library part CMP-001-00087-1, "Multilayer Ceramic Capacitor, 10 uF, 6.3 V, ± 20%, X5R, 0603 [1608 Metric]", Case Code (Imperial)=0603, Case Code (Metric)=1608, Dielectric=X5R, Manufacturer=Murata, Max Operating Temperature=85°C, Min Operating Temperature=-55°C, Package Quantity=4000, Tolerance=20%, Voltage Rating=6.3V, Case/Package=0603, Component Type=Capacitors, Height=0.8mm, Lead Free="Lead Free", Length=1.6mm, Manufacturer Part Number=GRM188R60J106ME47D, Mounting Technology="Surface Mount", Packaging="Cut Tape", RoHS Compliant=Yes, Series=GRM, Termination=Standard, Voltage Rating (DC)=6.3V, Weight=0.000222oz, Width=0.8mm
C15 C16 C17: library part CMP-001-00084-1, "Multilayer Ceramic Capacitor, 0.01 uF, 50 V, ± 10%, X7R, 0603 [1608 Metric]", Case Code (Imperial)=0603, Case Code (Metric)=1608, Dielectric=X7R, Manufacturer="Vishay Vitramon", Max Operating Temperature=125°C, Min Operating Temperature=-55°C, Package Quantity=1, Tolerance=10%, Voltage=50V, Case/Package=0603, Component Type=Capacitors, Construction=Flat, Depth=0.8mm, Height=0.92mm, Lead Free="Lead Free", Length=1.6mm, Manufacturer Part Number=VJ0603Y103KXAAC, Mounting Technology="Surface Mount", Packaging="Tape and Reel", Pins=2, Reach SVHC Compliant=Unknown, RoHS Compliant=Yes, Series=VJ, Termination=SMD/SMT, Thickness=0.036inch, Voltage Rating=50V, Voltage Rating (DC)=50V, Weight=7.1E-05oz, Width=0.031inch
D1A D1B D1C: library part CMP-007-00036-1, "LED Tri-Color Blue/Green/Red 469nm/529nm/623nm Chip LED 6-Pin PLCC T/R", Case/Package=PLCC, Color=Blue,Green,Red, Forward Current=20mA, Forward Voltage=3.1V, Manufacturer="Broadcom Avago", Max Operating Temperature=100°C, Min Operating Temperature=-40°C, Package Quantity=2000, Reverse Voltage=4V, Component Type=LED, Contact Plating=Silver, Dominant Wavelength=469nm, Height=2mm, Length=3mm, Lens Size=2.3mm, Lens Style=Flat,Square,Diffused,Rectangular, Lens Transparency=Diffused, Luminous Intensity=384mcd, Manufacturer Part Number=ASMT-YTB7-0AA02, Mounting Technology="Surface Mount", Number of LEDs=3, Orientation="Top View", Packaging="Cut Tape", Pins=6, Reach SVHC Compliant=No, Series=-, Test Current=20mA, Viewing Angle=120°, Weight=40mg, Width=2.8mm
L1 L2: library part CMP-006-00000-3, "IND, Chip Ferrite Bead, 330 Ohm, +/- 25%, 1.5 A, -55 to 125 degC, 0805 (2012 Metric), Tape and Reel", Case/Package=0805, Current Rating=1.5A, Manufacturer=Murata, Manufacturer Part Number=LQG15HS15NJ02D, Max Operating Temperature=125°C, Min Operating Temperature=-55°C, Package Description="2-Pin Surface Mount Device, Body 2 x1.25 mm", Package Quantity=4000, Resistance=90mohm, Tolerance=25%, Component Type=Inductors, Core Material=Ferrite, Datasheet URL=http://psearch.en.murata.com/inductor/product/LQG15HS15NJ02_.pdf, Datasheet Version=Nov-11, Impedance=330Ohm, Max Current Rating=1.5A, Mounting Technology=SM, Package Reference=0805, Packaging=TapeandReel, RoHS Compliant=True
MK1: library part CMP-010-000001-2, "4.0 mm, Omnidirectional, PCB Mount, 2.0 Vdc, Elecret Condenser Microphone", Clock Frequency=10kHz, Frequency=100Hz, Manufacturer="CUI Devices", Operating Supply Current=500uA, Operating Supply Voltage=2V, Package=None, Availability=Unavailable, Component Type=Standard, Design Item ID=CMEJ-0415-42-LP, Direction=Omnidirectional, Height=1.5mm, Length=4mm, Manufacturer Part Number=CMEJ-0415-42-LP, MF="{'manufacturer': u'CUI'}", MP=CMEJ-0415-42-LP, Output Type=Analog, Pin Count=2, Price=None, Series=CMEJ, Shape=Circular, Source=CMEJ-0415-42-LP.SchLib, Termination="PC Pins", Voltage Rating=2V, Width=4mm
R1 R2 R12 R13 R14 R15 R16 R17 R20 R21: library part CMP-009-00017-7, "Chip Resistor, 10 KOhm, +/- 1%, 01 W, -55 to 155 degC, 0603 (1608 Metric)", Case/Package=0603, Manufacturer=Yageo, Manufacturer Part Number=RC0603FR-0710KL, Max Operating Temperature=155°C, Min Operating Temperature=-55°C, Power=100mW, Tolerance=1%, Voltage Rating=50V, Component Type=Resistors, Mounting Technology=SM, Pins=2, RoHS Compliant=True
R3 R6 R9: library part CMP-009-00014-6, "Chip Resistor, 1 KOhm, +/-1%, 0.1 W, -55 to 155 degC, 0603 (1608 Metric)", Case/Package=0603, Manufacturer=Yageo, Manufacturer Part Number=RC0603FR-071KL, Max Operating Temperature=155°C, Min Operating Temperature=-55°C, Power=100mW, Tolerance=1%, Voltage Rating=50V, Component Type=Resistors, Mounting Technology=SM, Pins=2, RoHS Compliant=True
R4 R5 R18 R19 R22 R23: library part CMP-009-00006-6, "Chip Resistor, 0 Ohm, 0.1 W, -55 to 155 degC, 0603 (1608 Metric)", Case/Package=0603, Manufacturer=Yageo, Manufacturer Part Number=RC0603JR-130RL, Max Operating Temperature=155°C, Min Operating Temperature=-55°C, Power=100mW, Tolerance=5%, Voltage Rating=50V, Component Type=Resistors, Mounting Technology=SM, Pins=2, RoHS Compliant=True
R7 R8: library part CMP-009-00023-6, "Chip Resistor, 100 KOhm, +/- 1%, 0.1 W, -55 to 155 degC, 0603 (1608 Metric)", Case/Package=0603, Manufacturer=Yageo, Manufacturer Part Number=RC0603FR-07100KL, Max Operating Temperature=155°C, Min Operating Temperature=-55°C, Power=100mW, Tolerance=1%, Voltage Rating=50V, Component Type=Resistors, Mounting Technology=SM, Pins=2, RoHS Compliant=True
R10: library part CMP-009-00187-1, "Cermet trimmer potentiometer, 100 kΩ, 0.1 W, SMD, on top, TC33X-2-104E", Manufacturer=Bourns, Max Operating Temperature=100°C, Max Power Dissipation=100mW, Min Operating Temperature=-40°C, Package Quantity=1, Resistance Tolerance=25%, Resistor Type=Carbon,Cermet, Temperature Coefficient=250ppm/°C, Voltage Rating (DC)=50V, Component Type=Resistors, Depth=3.8mm, Height=0.047inch, Length=0.15inch, Manufacturer Part Number=TC33X-2-104E, Military Standard=Not, Mounting Technology="Surface Mount", Number of Turns=1, Packaging="Tape and Reel", Pins=2, Power Rating=100mW, Radiation Hardening=No, Reach SVHC Compliant=No, RoHS Compliant=Yes, Series=TC33, Termination="Foot Print", Tolerance=25%, Weight=29.4mg, Width=0.118inch
R11: library part CMP-009-00186-1, "SMD Chip Resistor, 2.2 kOhm, ± 1%, 100 mW, 0603 [1608 Metric], Thick Film, General Purpose", Case Code (Imperial)=0603, Case Code (Metric)=1608, Manufacturer=Vishay, Max Operating Temperature=155°C, Max Power Dissipation=100mW, Min Operating Temperature=-55°C, Package Quantity=10, Ratings=AEC-Q200, Resistance Tolerance=1%, Resistor Type="Thick Film", Temperature Coefficient=100ppm/°C, Voltage Rating=75V, Case/Package=0603, Component Type=Resistors, Construction=Rectangular, Contact Plating=Tin, Depth=0.85mm, Features="Automotive AEC-Q200", Height=0.45mm, Lead Free="Lead Free", Length=1.55mm, Manufacturer Part Number=CRCW06032K20FKEA, Military Standard=Not, Number of Terminations=2, Packaging="Tape and Reel", Power Rating=100mW, Radiation Hardening=No, Reach SVHC Compliant=Unknown, RoHS Compliant=Yes, Series=CRCW, Technology="THICK FILM", Termination=SMD/SMT, Tolerance=1%, Voltage Rating (DC)=75V, Weight=7.1E-05oz, Width=0.033inch
R24A R24B R24C: library part CMP-009-00179-1, "SMD Chip Resistor, 150 Ohm, ± 1%, 100 mW, 0603 [1608 Metric], Thick Film, General Purpose", Case Code (Imperial)=0603, Case Code (Metric)=1608, Manufacturer=Vishay, Max Operating Temperature=155°C, Max Power Dissipation=100mW, Min Operating Temperature=-55°C, Package Quantity=5000, Ratings=AEC-Q200, Resistance Tolerance=1%, Resistor Type="Thick Film", Temperature Coefficient=100ppm/°C, Voltage Rating=75V, Case/Package=0603, Component Type=Resistors, Construction=Rectangular, Contact Plating=Tin, Depth=0.85mm, Features="Automotive AEC-Q200", Height=0.45mm, Lead Free="Lead Free", Length=1.55mm, Manufacturer Part Number=CRCW0603150RFKEA, Military Standard=Not, Number of Terminations=2, Packaging="Tape and Reel", Power Rating=100mW, Radiation Hardening=No, Reach SVHC Compliant=Unknown, RoHS Compliant=Yes, Series=CRCW, Technology="THICK FILM", Termination=SMD/SMT, Tolerance=1%, Voltage Rating (DC)=75V, Weight=7.1E-05oz, Width=0.85mm
R25A R25B R25C R26A R26B R26C: library part CMP-009-00180-1, "SMD Chip Resistor, 50 Ohm, ± 1%, 100 mW, 0603 [1608 Metric], Thick Film, General Purpose", Case Code (Imperial)=0603, Case Code (Metric)=1608, Manufacturer="Vishay Dale", Max Operating Temperature=155°C, Max Power Dissipation=100mW, Min Operating Temperature=-55°C, Package Quantity=5000, Resistance Tolerance=1%, Resistor Type="Thick Film", Temperature Coefficient=100ppm/°C, Voltage Rating=75V, Case/Package=0603, Component Type=Resistors, Contact Plating=Tin, Depth=0.85mm, Features="Automotive AEC-Q200", Height=0.45mm, Lead Free="Lead Free", Length=1.55mm, Manufacturer Part Number=CRCW060350R0FKEA, Number of Terminations=2, Packaging="Tape and Reel", Pins=2, Power Rating=100mW, Radiation Hardening=No, Reach SVHC Compliant=No, RoHS Compliant=Yes, Series=CRCW, Technology="THICK FILM", Termination=SMD/SMT, Tolerance=1%, Voltage Rating (DC)=75V, Weight=7.1E-05oz, Width=0.85mm
SW1 SW2 SW3: library part CMP-011-00013-1, "Switch Tactile OFF (ON) SPST Round Button Gull Wing 0.05A 12VDC 1.57N SMD Loose Piece", Case/Package=SMD/SMT, Color=Black, Contact Current Rating=50mA, Insulation Resistance=100MR, Manufacturer="TE Connectivity", Max Operating Temperature=85°C, Min Operating Temperature=-35°C, Operating Force=1.57N, Package Quantity=750, Voltage Rating=24V, Actuator Length=1.4mm, Actuator Material=Polyphenylene, Actuator Type=Standard, Component Type=Switches, Contact Material="Copper Alloy,Silver", Contact Plating=Silver, Current Rating=50mA, Depth=10mm, ELV=Compliant, Illumination Type=Non-Illuminated,Illuminated, Lead Free="Lead Free", Length=6mm, Manufacturer Part Number=FSM4JSMA, Max Current Rating=50mA, Mechanical Life=100000Cycles, Mounting Technology="Surface Mount", Orientation=Straight, Packaging=Bulk, Reach SVHC Compliant=Unknown, RoHS Compliant=Yes, Series=FSMJSMA, Switch Function=Off-Mom, Switch Travel=0.25mm, Termination="Gull Wing", Throw Configuration=SPST, Voltage Rating (DC)=24V, Width=6mm
U1: library part CMP-006-000001-6, "Raspberry Pi Pico W RP2040", Manufacturer="Raspberry Pi", Package=None, Availability="In Stock", Check_prices=https://www.snapeda.com/parts/SC0918/Raspberry+Pi/view-part/?ref=eda, Component Type=Standard, Design Item ID=SC0918, Manufacturer Part Number=SC0918, MF="Raspberry Pi", MP=SC0918, Pin Count=53, Price=None, Purchase-URL=https://pricing.snapeda.com/search/part/SC0918/?ref=eda, SnapEDA_Link=https://www.snapeda.com/parts/SC0918/Raspberry+Pi/view-part/?ref=snap, Source=SC0918.SchLib
U2: library part CMP-010-00032-3, "Mems Module, 1.71-3.6 V, Lga-14 Rohs Compliant: Yes", Manufacturer=TDK, Min Operating Temperature=-40°C, Component Type=Sensors, Length=2.5mm, Manufacturer Part Number=ICM-42670-P, Width=3mm
U3: library part CMP-010-00031-2, "High-speed high-precision digital ambient light sensor (ALS) 8-SOT-5X3 -40 to 85", Manufacturer="Texas Instruments", Component Type=Sensors, Height=600um, Length=2.1mm, Manufacturer Part Number=OPT4001DTSR, Pins=8, Thickness=550um, Width=1.2mm
U4: library part CMP-00027-00002-4, "Audio Amp Microphone 1-CH Mono Class-AB 5-Pin SC-70 T/R", Manufacturer=Maxim, Max Operating Temperature=85°C, Max Supply Voltage=5.5V, Min Operating Temperature=-40°C, Min Supply Voltage=2.4V, Power Supply Rejection Ratio (PSRR)=112dB, Component Type=Audio, Gain Bandwidth Product=600kHz, Manufacturer Part Number=MAX4466EXK-T, Mounting Technology="Surface Mount", Packaging="Tape and Reel", Radiation Hardening=No, RoHS Compliant=No, Series=-
U5: library part CMP-010-00027-2, "Pressure Sensor, Barometric, 300 mbar, 1200 mbar, QFN, 8, -40 C", Case/Package=QFN, Manufacturer="Measurement Specialties", Max Operating Temperature=85°C, Max Supply Voltage=3.6V, Min Operating Temperature=-40°C, Min Supply Voltage=1.8V, Supply Current=20.09uA, Component Type=Sensors, Height=1mm, Lead Free="Lead Free", Manufacturer Part Number=MS563702BA03-50, Packaging="Cut Tape", Pins=8, Pressure Type=Barometric, Reach SVHC Compliant=No, RoHS Compliant=Yes
U6: library part CMP-010-00033-3, "Humidity And Temperature Sensor", Manufacturer=Sensirion, Component Type=Sensors, Manufacturer Part Number=SHT40I-AD1B-R3
U7: library part CMP-016-00011-5, "IC Gpio Expander I2C 16CH 28QFN / I2C Interface 5.5V 28-PIN Qfn-ut Ep T/r", Case/Package=QFN, Frequency=400kHz, Manufacturer=Semtech, Max Operating Temperature=85°C, Min Operating Temperature=-40°C, Component Type=Logic, Interface=I2C, Lead Free="Lead Free", Manufacturer Part Number=SX1509BIULTRT, Mounting Technology="Surface Mount", Number of I/Os=16, Packaging="Cut Tape", Pins=28, RoHS Compliant=Yes, Series=-

## Via types
v1: diameter 19.68, hole 7.87, Top Layer to Bottom Layer, 4 vias

## Nets (pads, with @x,y where several pads share a name; then routed paths per layer and width w, separated by ;. In a path a pad name is that pad's centre, name@x,y a point inside that pad or via, vN(x,y) a via of type N, cw(c..) or ccw(c..) an arc to the next point about the centre after c; other vN are vias at no path point)
+3V3: C1.2 C4.2 C5.2 C9.2 C10.2 C11.2 C12.2 C13.2 L1.2 R1.2 R2.2 R4.1 R12.1 R14.1 R15.1 R17.1 R18.1 R19.1 R20.1 U1.36 U2.5 U2.8 U3.1 U5.1 U6.3 U7.4 U7.12 U7.18
+3V3A: C2.1 L1.1 R3.1 R7.2 U4.5
AGND: C2.2 C3.1 C8.1 L2.1 MK1.P R8.1 U4.2
BTN_1: C15.2 R13.2 U7.27
BTN_2: C16.2 R16.2 U7.28
BTN_3: C17.2 R21.2 U7.1
GND: C1.1 C4.1 C5.1 C9.1 C10.1 C11.1 C12.1 C13.1 C14.1 C15.1 C16.1 C17.1 D1A.1 D1A.2 D1A.3 D1B.1 D1B.2 D1B.3 D1C.1 D1C.2 D1C.3 L2.2 R5.1 R22.1 R23.1 SW1.3 SW1.4 SW2.3 SW2.4 SW3.3 SW3.4 U1.3 U1.8 U1.13 U1.18 U1.23 U1.28 U1.33 U1.38 U1.A U1.B U1.C U1.D U1.F U1.TP1 U2.2 U2.3 U2.6 U2.7 U2.10 U2.11 U3.4 U5.4 U6.4 U7.3 U7.17 U7.29
  other v1: 12293.35,3638.35 12336.65,3638.35 12293.35,3681.65 12336.65,3681.65
"GP0/MB1 TX": U1.1
"GP1/MB1 RX": U1.2
"GP2/MB1 PWM": U1.4
"GP3/MB1 INT": U1.5
"GP4/I2C0 SDA": U1.6 U3.5 U5.3 U6.2
"GP5/I2C0 SDL": U1.7 U3.8 U5.2 U6.1
"GP6/MB1 RST": U1.9
"GP7/MB2 PWM": U1.10
"GP8/MB2 TX": U1.11
"GP9/MB2 RX": U1.12
"GP10/MOT CSn": U1.14 U2.12
"GP11/SX INTn": U1.15
"GP12/ICM INT1": R1.1 R2.1 U1.16 U2.4
"GP13/OPT INT": U1.17 U3.7
"GP14/MB1 CS": U1.19
"GP15/SD DET": U1.20
"GP16/SPIO RX": U1.21 U2.1
"GP17/SPIO CSn": U1.22
"GP18/SPIO SCK": U1.24 U2.13
"GP19/SPIO TX": U1.25 U2.14
"GP20/MB2 RST": U1.26
"GP21/MB2 INT": U1.27
"GP22/MB2 CS": U1.29
"GP26/MB1 ADC": U1.31
"GP27/MB2 ADC": U1.32
GP28/ADC2: U1.34
"I2C SCL": U7.25
"I2C SDA": U7.24
LED_BA: R26A.2 U7.8
LED_BB: R26B.2 U7.15
LED_BC: R26C.2 U7.22
LED_GA: R25A.2 U7.7
LED_GB: R25B.2 U7.14
LED_GC: R25C.2 U7.21
LED_RA: R24A.2 U7.6
LED_RB: R24B.2 U7.13
LED_RC: R24C.2 U7.20
"MIC OUT": C7.2 R10.1 R10.2 U4.4
NetC3_2: C3.2 R3.2 R6.1
NetC6_1: C6.1 R7.1 R8.2 U4.1
NetC6_2: C6.2 MK1.N R6.2
NetC7_1: C7.1 R9.2 R11.1 U4.3
NetC8_2: C8.2 R9.1
NetC14_2: C14.2 R14.2 U7.23
NetD1A_4: D1A.4 R24A.1
NetD1A_5: D1A.5 R25A.1
NetD1A_6: D1A.6 R26A.1
NetD1B_4: D1B.4 R24B.1
NetD1B_5: D1B.5 R25B.1
NetD1B_6: D1B.6 R26B.1
NetD1C_4: D1C.4 R24C.1
NetD1C_5: D1C.5 R25C.1
NetD1C_6: D1C.6 R26C.1
NetR4_2: R4.2 R5.2 U3.2
NetR10_3: R10.3 R11.2
NetR12_2: R12.2 R13.1 SW1.1 SW1.2
NetR15_2: R15.2 R16.1 SW2.1 SW2.2
NetR20_2: R20.2 R21.1 SW3.1 SW3.2
NetU7_9: U7.9
SX15_ADDR0: R19.2 R23.2 U7.26
SX15_ADDR1: R18.2 R22.2 U7.10
SX15_INTn: R17.2
VBUS: U1.40
VREF: U1.35
VSYS: U1.39
pads on no net: U1.30 U1.37 U1.E U1.G U1.TP2 U1.TP3 U1.TP4 U1.TP5 U1.TP6 U2.9 U3.3 U3.6 U7.2 U7.5 U7.11 U7.16 U7.19

## Text inside footprints (layer, text, board x,y; h text height)
MK1: Top Overlay "+" at 8990,4040 h59.06; Top Overlay "-" at 9055,4045 h59.06